# Altium PCB SiLPA_HE.PcbDoc (part 6 of 10)
Units mm, origin at the board's own origin, x right, y up, seen from the top; angles counter-clockwise.
Board outline 222.47 x 100.01 mm, 4 copper layers (Top Layer, Int1 (GND), Int2 (PWR), Bottom Layer), stack 1.508 mm thick; 661 components, 355 nets, 1925 pads, 1744 vias.
Unrouted connection lines stored in the file: 360.
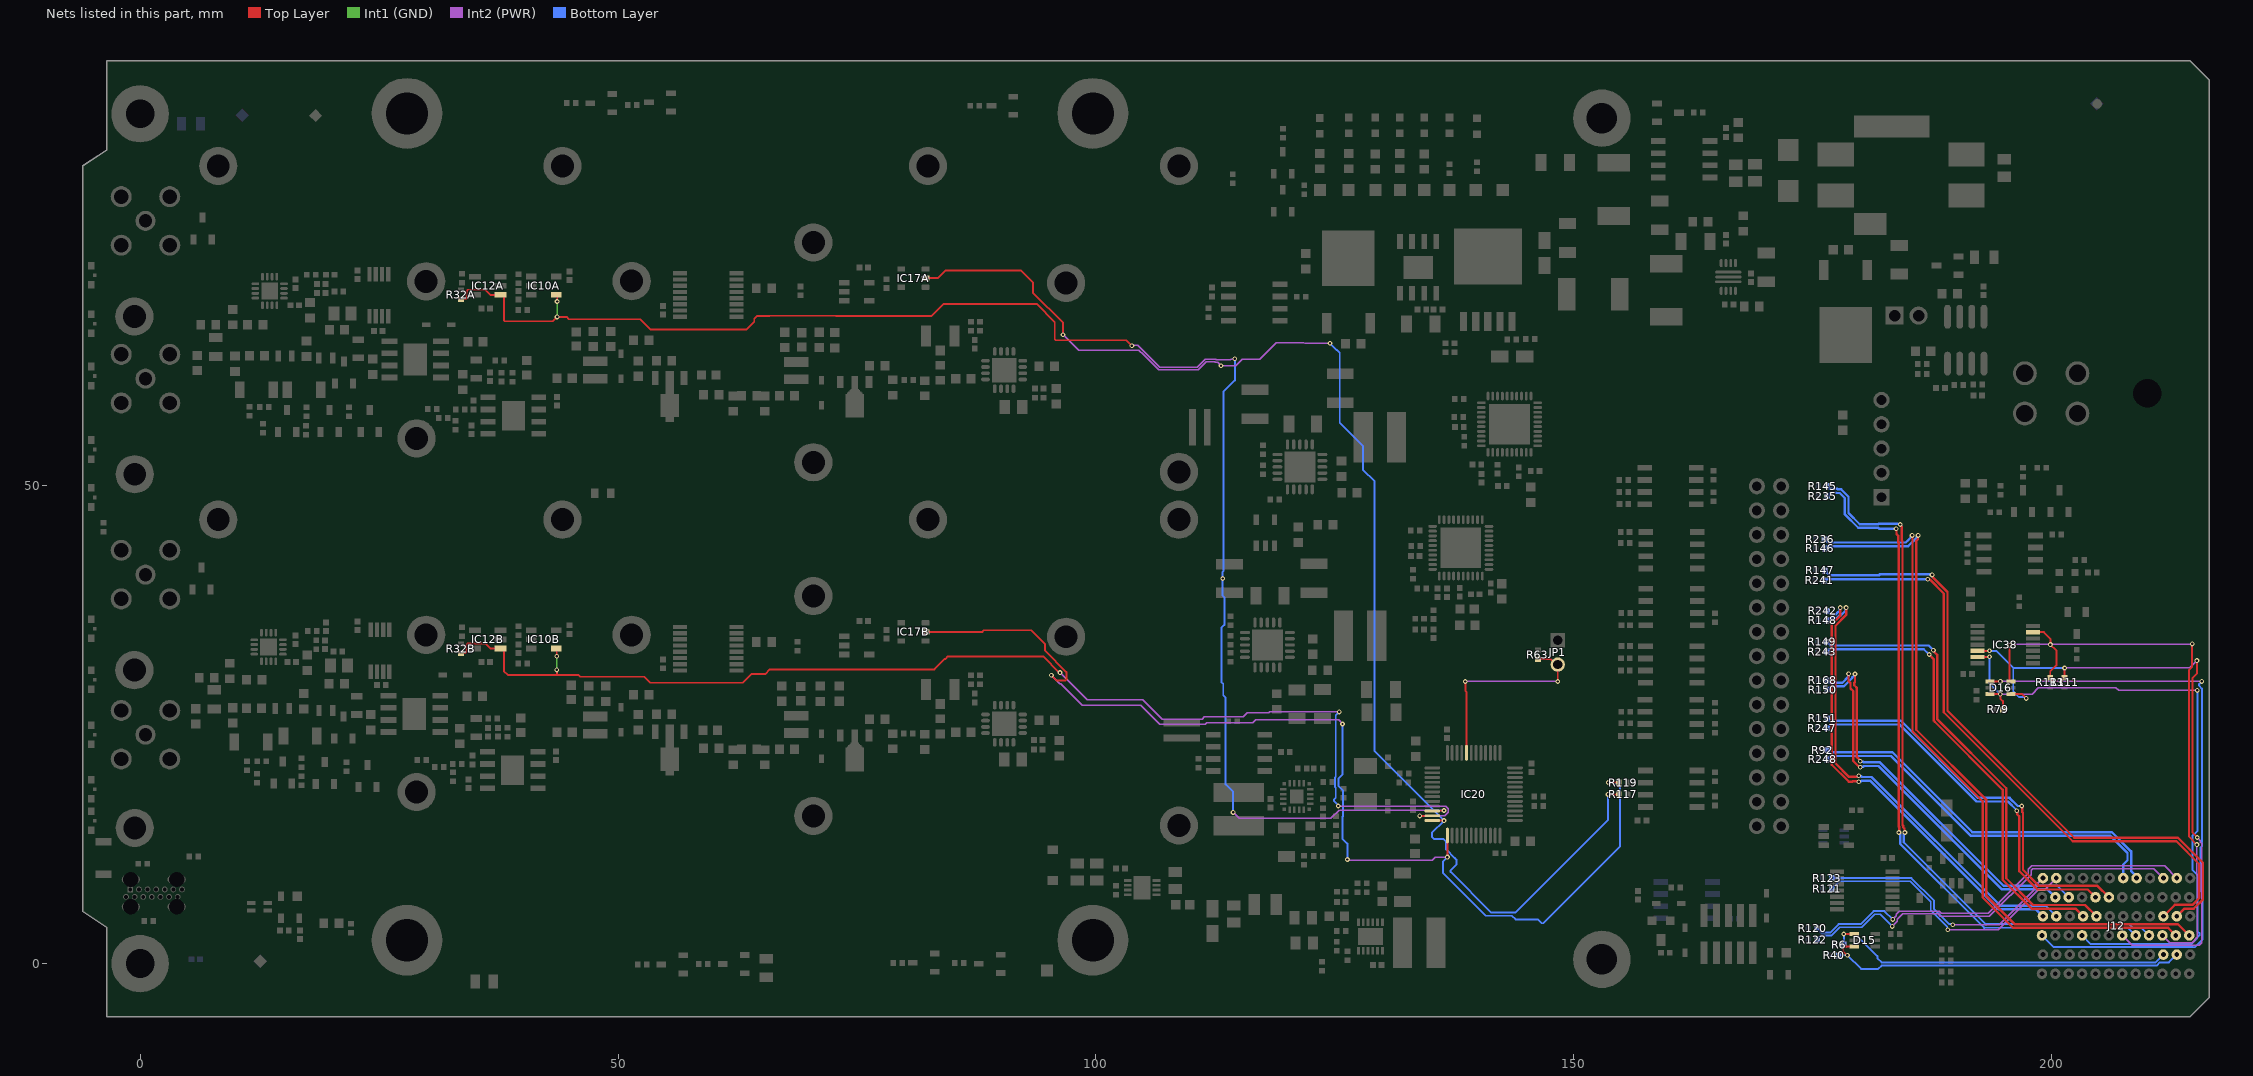
[diagram p5: the nets of this part, all layers, seen from the top]

## Part data (continued)
SCREW1A SCREW1B SCREW2A SCREW2B SCREW3A SCREW3B SCREW4A SCREW4B SCREW5A SCREW5B SCREW6A SCREW6B SCREW7A SCREW7B SCREW8A SCREW8B SCREW9A SCREW9B SCREW10A SCREW10B SCREW11A SCREW11B SCREW12A SCREW12B SCREW13A SCREW13B: library part BOSSARD_BN5687-3061579_v, "Screw", Manufacturer=BOSSARD, Manufacturer Part Number="BN5687 Art.3061579", Author="CERN DEM JLC", Component Type=Mechanical, ComponentHeight=5.6mm, CreateDate=01.11.2018, HelpURL=\\cern.ch\dfs\Applications\Altium\Datasheets\BOSSARD_BN5687-3061579.pdf, LatestRevisionDate=01.11.2018, Mounted=Yes, PackageDescription="M2 L=4mm Hexalobular Socket Pan Head Screw, Fully Threaded - Stainless Steel A2", Part Description="M2 L=4mm Hexalobular Socket Pan Head Screw, Fully Threaded, Stainless Steel A2", Part Number=BOSSARD_BN5687-3061579_v, Pin Count=0, PressFit=No, Sense=No, SMD=No, Socket=No, Status=None
SW1: library part CMP-08834-000057-1, "SWITCH TACTILE SPST-NO 0.05A 12V", Case/Package=SMD/SMT, Contact Resistance=100mR, Current Rating=50mA, Max Operating Temperature=70°C, Max Voltage Rating (DC)=12V, Min Operating Temperature=-25°C, Operating Force=1.59N, Package Quantity=1000, Ratings="Dust Proof", Actuator Length=0.7mm, Connector Type=SMD/SMT, Depth=3.2mm, Electrical Life=100000Cycles, Illumination Type=Non-Illuminated, Length=4mm, Max Current Rating=50mA, Mechanical Life=100000Cycles, Mount="Surface Mount", Orientation="Right Angle", Packaging="Tape and Reel", RoHS Compliant=Yes, Series=B3U, Switch Function=Off-Mom, Switch Travel=0.2mm, Termination="Gull Wing", Throw Configuration=SPST, Voltage Rating (DC)=12V, Weight=0.022g
T1 T2 T3 T4 T5 T9 T10 T11 T12: "N-CHANNEL MOSFET WITH DIODE", Case=SOT23-3, Manufacturer=NEXPERIA, Author="CERN DEM JLC", Bonding=No, Component Type=Standard, ComponentHeight=1.1mm, CreateDate=16.03.2010, Device=BSH103, HelpURL=\\cern.ch\dfs\Applications\Altium\Datasheets\BSH103.pdf, LatestRevisionDate=20.06.2017, Manufacturer Part Number=BSH103, Mounted=Yes, PackageDescription="SOT23, 0.95mm Pitch; 3 Pin, 1.30mm W X 2.90mm L X 1.10mm H body, IPC Medium Density", Part Description="30V, 850mA N-Channel Enhancement Mode Field-Effect Transistor", Part Number=BSH103, Pin Count=3, PressFit=No, Sense=No, SMD=Yes, Socket=No
T6A T6B T7A T7B T8A T8B T14 T15 T16 T17 T18 T19: "N-CHANNEL MOSFET WITH DIODE", Case=SOT23-3, Manufacturer="ON SEMICONDUCTOR", Author="CERN DEM JLC", Bonding=No, Component Type=Standard, ComponentHeight=1.11mm, CreateDate=23.03.2009, Device=BSS138LT1G, HelpURL=\\cern.ch\dfs\Applications\Altium\Datasheets\BSS138LT1G.pdf, LatestRevisionDate=23.03.2009, Manufacturer Part Number=BSS138LT1G, Mounted=Yes, Part Description="50V 200mA N-Channel Enhancement Mode Field-Effect Transistor", Part Number=BSS138LT1G, Pin Count=3, PressFit=No, Sense=No, SMD=Yes, Socket=No
  T6A T6B T7A T7B T8A T8B T14 T15 T16 T18 T19: PackageDescription="SOT23, 0.95mm Pitch; 3 Pin, 1.40mm W X 3.00mm L X 1.10mm H body, IPC Medium Density"
  T17: PackageDescription="SOT23 3-Leads, Pitch 0.95mm - Body 1.4x3mm, IPC Medium Density"
T13: "-30V -19.7A P-Channel MOSFET", Case=SOIC8, Manufacturer="VISHAY SILICONIX", Author="CERN DEM MR", Bonding=No, Component Type=Standard, ComponentHeight=1.75mm, CreateDate=05/10/2016, Device=SI4425DDY-T1-GE3, HelpURL=\\cern.ch\dfs\Applications\Altium\Datasheets\SI4425DDY-T1-GE3.pdf, LatestRevisionDate=05/10/2016, Manufacturer Part Number=SI4425DDY-T1-GE3, Mounted=Yes, PackageDescription="SOIC 8, Pitch 1.27mm - Body 4x5mm, IPC Medium Density", Part Description="-30V -19.7A P-Channel MOSFET", Part Number=SI4425DDY-T1-GE3, Pin Count=8, PressFit=No, Sense=No, SMD=Yes, Socket=No
TP1 TP2 TP3 TP4 TP5 TP16 TP18 TP22 TP23: library part SMD_PAD_1.27X1.27MM, Author="CERN DEM JLC", Component Type="Standard (No BOM)", ComponentHeight=0mm, CreateDate=12.01.2008, Family="Test Point", HelpURL=Undefined, LatestRevisionDate=12.01.2008, Mounted=No, PackageDescription="1.27mm x 1.27mm PCB Copper Area (SMD Test Point)", Part Description="1.27mm x 1.27mm PCB Copper Area (SMD Test Point)", Part Number=SMD_PAD_1.27X1.27MM, Pin Count=1, Sense=No, SMD=Yes, Socket=No, Status=None
U1: library part CMP-0192-00056-1, "PWM Fan Speed Controller with Auto-Shutdown and FanSense Technology, 8-Pin SOIC, Industrial Temperature", Code_IPC=SOIC127P600-8, DatasheetVersion="revC, Oct-2002", PackageDescription="8-Lead Plastic Small Outline (OA) - Narrow, 3.90mm Body [SOIC]", PackageReference=SOIC-OA8, PackageVersion="revBB, Aug-2009"
W1: library part SAMTEC_HTSW-105-23-L-S, "5 Mini Wire-Wrap Contact Strip Header", Manufacturer=SAMTEC, Manufacturer Part Number=HTSW-105-23-L-S, Author="CERN DEM JLC", Component Type=Standard, ComponentHeight=8.38mm, CreateDate=22.02.2018, Family="Header 5", HelpURL=\\cern.ch\dfs\Applications\Altium\Datasheets\SAMTEC_HTSW-105-23-L-S.pdf, LatestRevisionDate=22.02.2018, Mounted=Yes, Part Description="5 Contacts, Pitch 2.54mm, Single Row  Through Mount Straight Header (Post Lead 5.84mm, Tail Lead 2.92mm, Insulator 2.54mm)", Part Number=SAMTEC_HTSW-105-23-L-S, Pin Count=5, PressFit=No, Sense=No, SMD=No, Socket=No, Status=Preferred, Status Comment="High Temperature"
WASHER2 WASHER4 WASHER6 WASHER8: library part Keystone_7687, "SMA_Shoulder Washer", Manufacturer="custom 3D", Author=GK, Component Type=Mechanical, ComponentHeight=1.91mm, CreateDate=28.01.2016, HelpURL=\\cern.ch\dfs\Applications\Altium\Datasheets\AAVID-THERMALLOY_7721-7PPSG.pdf, LatestRevisionDate=28.01.2016, Manufacturer Part Number="custom 3D", Mounted=Yes, PackageDescription="Polyphenylene Sulfide PPS Shoulder Washer", Part Description="Polyphenylene Sulfide PPS Shoulder Washer", Part Number="custom 3D", Pin Count=0, PressFit=No, Sense=No, SMD=No, Socket=No, Status=None

## Free pads (board coordinates)
  round 6 hole 3.2: 0(152.927,0.443) 0(152.927,88.443)

## Via types
v1: diameter 0.5, hole 0.25, Top Layer to Bottom Layer, tented both sides, 1439 vias
v2: diameter 0.5, hole 0.25, Top Layer to Bottom Layer, tented bottom, 291 vias
v3: diameter 0.5, hole 0.25, Top Layer to Bottom Layer, 12 vias
v4: diameter 0.5, hole 0.25, Top Layer to Bottom Layer, tented top, 2 vias

## Nets (pads, with @x,y where several pads share a name; then routed paths per layer and width w, separated by ;. In a path a pad name is that pad's centre, name@x,y a point inside that pad or via, vN(x,y) a via of type N, cw(c..) or ccw(c..) an arc to the next point about the centre after c; other vN are vias at no path point)
ADC_IN0: IC10A.4 IC12A.1 IC20.10 R32A.1 | length 166
  Top Layer w0.152: IC10A.4@43.517,69.973 43.624,69.866 v1(43.624,69.26)
  Top Layer w0.2: R32A.1@33.427,69.503 34.044,69.503 34.161,69.62 34.161,70.356 34.294,70.489 36.131,70.489 36.677,69.943 37.851,69.943 38.057,69.737 38.057,68.753 38.059,68.751 38.059,67.29 38.147,67.202 43.172,67.202 v1(43.624,67.654) 44.623,67.654 44.869,67.408 52.341,67.408 53.429,66.319 63.428,66.319 64.252,67.143 64.252,67.467 64.551,67.766 65.856,67.766 65.86,67.771 72.789,67.771 72.793,67.766 82.811,67.766 84.066,69.021 93.779,69.021 95.685,67.116 95.685,65.3 95.772,65.212 103.186,65.212 v1(103.757,64.642) ; IC20.10@135.188,15.968 135.211,15.991 136.389,15.991 v1(136.413,16.015)
  Int2 (PWR) w0.15: v1(103.757,64.642) 103.824,64.708 104.199,64.708 ; 104.199,64.709 104.349,64.709 106.675,62.383 110.574,62.383 111.427,63.236 112.543,63.236 112.59,63.19 114.092,63.19 114.104,63.201 114.46,63.201 v1(114.527,63.268) ; v1(114.343,15.818) 114.98,15.181 124.566,15.181 125.424,16.04 ; 125.511,16.015 v1(136.413,16.015)
  Int1 (GND) w0.152: v1(43.624,67.654) v1(43.624,69.26)
  Bottom Layer w0.2: v1@113.31,40.348 v1(113.253,40.291) ; v1(114.343,15.818) 114.343,17.976 113.57,18.749 113.57,27.795 113.317,28.048 113.317,29.252 113.116,29.453 113.116,35.111 113.429,35.424 113.429,38.32 113.253,38.496 v1(113.253,40.291) ; v1@114.525,63.266 v1(114.527,63.268) 114.527,61.011 113.34,59.824 113.34,41.046 113.253,40.959 v1(113.253,40.291)
ADC_IN1: IC10B.4 IC12B.1 IC20.11 R32B.1 | length 129.4
  Top Layer w0.2: R32B.1@33.427,32.503 34.044,32.503 34.161,32.62 34.161,33.356 34.294,33.489 35.732,33.489 35.756,33.465 36.155,33.465 36.677,32.943 37.853,32.943 38.054,32.741 38.054,30.606 38.459,30.202 43.607,30.202 ; IC10B.4@43.517,32.973 43.591,32.899 v1(43.591,32.157) ; v1(43.591,30.726) 43.607,30.71 43.607,30.202 ; v1(96.241,30.445) 96.176,30.445 94.49,32.132 84.513,32.132 84.258,31.876 84.204,31.876 83.098,30.771 65.86,30.771 65.379,30.29 63.946,30.29 63.034,29.378 53.371,29.378 52.739,30.009 46.023,30.009 45.83,30.202 43.607,30.202 ; v1(133.868,15.451) 133.876,15.46 135.179,15.46 IC20.11@135.188,15.468
  Int2 (PWR) w0.15: v1(96.241,30.445) 99.086,27.6 104.897,27.6 106.912,25.585 111.098,25.585 111.313,25.8 115.387,25.8 115.564,25.977 ; 115.565,25.977 115.842,26.253 118.087,26.253 118.165,26.332 v1(125.44,26.332) ; v1(125.356,16.488) v1@125.36,16.492 ; v1@125.447,16.467 136.6,16.467 136.865,16.202 136.865,15.828 136.488,15.451 v1(133.868,15.451)
  Int1 (GND) w0.15: v1(43.591,30.726) v1(43.591,32.157)
  Bottom Layer w0.2: v1(125.356,16.488) 125.356,16.569 124.922,17.003 124.922,17.169 125.087,17.334 125.087,18.411 125.023,18.475 125.023,19.468 125.08,19.525 125.08,25.963 v1@125.44,26.323
ADC_IN2: IC17A.2 IC20.12 R117.1 | length 139.9
  Top Layer w0.2: IC17A.2@82.167,71.702 83.466,71.702 84.279,72.515 92.154,72.515 93.427,71.241 93.427,70.149 96.555,67.021 v1(96.555,65.795) ; IC20.12@135.188,14.968 135.193,14.963 136.407,14.963 v1(136.413,14.957) ; v1(153.572,17.696) 154.704,17.696 R117.1@154.707,17.693
  Int2 (PWR) w0.15: v1(96.555,65.795) 97.94,64.409 97.947,64.403 98.211,64.169 104.49,64.169 104.972,63.687 104.975,63.687 106.559,62.104 110.69,62.104 111.542,62.956 112.428,62.956 112.474,62.91 112.718,62.91 v1(113.076,62.552) 114.619,62.552 115.311,63.244 117.117,63.244 118.843,64.969 121.756,64.969 121.832,64.893 v1(124.479,64.893)
  Bottom Layer w0.2: v1@113.032,62.507 v1(113.076,62.552) ; v1(124.479,64.893) 125.189,64.183 125.225,64.183 125.504,63.903 125.504,56.6 127.933,54.171 127.933,51.687 129.158,50.462 129.158,22.213 v1(136.413,14.957) 135.137,13.682 135.137,13.272 135.383,13.026 136.358,13.026 136.638,12.747 136.638,11.942 137.546,11.035 137.705,10.876 137.705,10.35 137.425,10.07 137.104,9.749 137.104,9.583 141.358,5.329 143.838,5.329 153.572,15.064 v1(153.572,17.696)
ADC_IN3: IC17B.2 IC20.13 R119.1 | length 114.8
  Top Layer w0.2: IC17B.2@82.242,34.702 88.114,34.702 88.281,34.869 93.216,34.869 94.675,33.41 94.675,32.727 96.907,30.495 96.907,29.713 96.79,29.596 95.905,29.596 v1(95.336,30.164) ; v1(136.763,11.143) IC20.13@136.763,13.393 ; v1(153.586,18.943) R119.1@154.707,18.943
  Int2 (PWR) w0.15: v1(95.336,30.164) 95.336,30.147 96.184,29.299 96.294,29.299 98.543,27.05 104.664,27.05 106.679,25.035 111.416,25.035 111.587,25.205 116.396,25.205 116.708,25.518 125.383,25.518 125.787,25.114 v1(125.787,25.06) ; v1(126.304,10.888) v1@126.339,10.852 ; v1@126.426,10.827 135.166,10.827 135.482,11.143 v1(136.763,11.143)
  Bottom Layer w0.2: v1(125.787,25.06) 125.787,19.77 125.353,19.336 125.353,18.607 125.833,18.127 125.833,15.386 125.787,15.339 125.787,13.077 126.304,12.56 v1(126.304,10.888) ; v1(136.763,11.143) 136.308,10.688 136.308,9.466 140.772,5.002 143.516,5.002 143.9,4.618 146.227,4.618 146.63,4.215 146.796,4.215 154.841,12.26 154.841,18.387 154.285,18.943 v1(153.586,18.943)
BGA0: D16.3 IC38.6 J12.C3 R113.2 | length 65.2
  Top Layer w0.2: v1(195.579,33.286) 195.579,29.636 195.703,29.512 D16.3@195.736,29.512 ; IC38.6@198.036,34.668 199.163,34.668 199.852,33.979 v1(199.852,33.368) 200.466,32.754 200.466,31.203 199.832,30.569 R113.2@199.832,29.92 ; v1@214.765,33.443 214.677,33.355 214.677,31.05 214.352,30.725 214.352,13.268 v1(215.177,12.443)
  Int2 (PWR) w0.15: v1(195.579,33.286) 195.622,33.329 196.058,33.329 196.134,33.406 199.815,33.406 v1(199.852,33.368) 199.89,33.406 214.639,33.406 v1(214.677,33.443) ; J12.C3@211.566,2.943 212.319,2.19 214.678,2.19 215.219,2.731 215.219,9.255 215.177,9.297 v1(215.177,12.443)
BGA1: D16.1 IC38.12 J12.F3 R111.2 | length 69.8
  Top Layer w0.2: IC38.12@192.236,32.718 v1(193.481,32.718) ; D16.1@195.736,28.212 196.841,28.212 v1(197.313,27.741) ; v1(201.33,30.927) 201.33,29.923 R111.2@201.332,29.92 ; v1(215.177,31.693) 215.177,30.343 214.715,29.881 214.715,13.696 v1(215.218,13.193)
  Int2 (PWR) w0.15: v1(201.33,30.927) 214.411,30.927 v1(215.177,31.693) ; J12.F3@207.366,2.943 208.399,1.91 215.394,1.91 215.677,2.193 215.677,12.584 215.547,12.714 215.547,12.844 215.218,13.173 v1(215.218,13.193)
  Bottom Layer w0.2: v1(193.481,32.718) 194.174,32.718 195.965,30.927 ; v1(197.313,27.741) 197.218,27.741 197.071,27.888 196.561,27.888 195.965,28.485 195.965,30.927 ; v1(201.33,30.927) 195.965,30.927
BGA2: D16.6 IC38.13 J12.I3 R79.2 | length 68.6
  Top Layer w0.2: IC38.13@192.236,32.068 192.259,32.091 v1(193.481,32.091) ; D16.6@193.536,28.212 193.546,28.203 194.592,28.203 v1(194.602,28.193) 194.608,28.187 194.608,27.718 194.872,27.453 R79.2@194.872,26.589
  Int2 (PWR) w0.15: v1(194.602,28.193) 197.927,28.193 198.596,28.862 206.705,28.862 206.989,28.578 v1(215.218,28.578)
  Bottom Layer w0.2: v1(193.481,32.091) 193.481,29.314 v1(194.602,28.193) ; J12.I3@203.166,2.943 204.062,2.047 214.569,2.047 215.143,2.621 215.143,2.655 215.427,2.939 215.427,3.193 215.218,3.402 215.218,4.596 215.243,4.621 215.243,9.265 214.7,9.808 214.7,13.349 215.218,13.868 v1(215.218,28.578)
BGA3: D16.4 J12.L3 | length 67.2
  Top Layer w0.2: D16.4@193.536,29.512 193.541,29.517 194.611,29.517 v1(194.616,29.522)
  Int2 (PWR) w0.15: v1(194.616,29.522) v1(215.677,29.522)
  Bottom Layer w0.2: J12.L3@198.966,2.943 200.189,1.72 214.788,1.72 214.796,1.712 214.962,1.712 215.754,2.504 215.754,7.39 215.57,7.574 215.57,12.161 215.695,12.287 215.695,28.776 215.396,29.075 215.396,29.241 v1(215.677,29.522)
BOOT0: IC20.44 JP1.2 R63.1 | length 21.6
  Top Layer w0.2: v1(138.642,29.514) 138.642,28.531 138.763,28.41 IC20.44@138.763,22.043 ; R63.1@146.227,31.84 146.244,31.857 147.567,31.857 148.143,31.281 JP1.2@148.31,31.281 v1(148.31,29.514)
  Int2 (PWR) w0.15: v1(138.642,29.514) v1(148.31,29.514)
  Bottom Layer w0.2: JP1.2@148.039,31.281 JP1.2@148.31,31.281
BP_I2C.SCL: D15.3 J12.B2 R40.1 | length 38.7
  Top Layer w0.2: v1(178.615,0.869) 178.548,0.869 178.178,1.239 178.178,1.584 178.387,1.793 D15.3@179.327,1.793
  Bottom Layer w0.2: R40.1@177.724,0.857 177.736,0.869 v1(178.615,0.869) 180.047,-0.563 181.123,-0.563 181.128,-0.557 181.834,-0.557 182.187,-0.204 210.981,-0.204 211.308,0.123 212.246,0.123 J12.B2@213.066,0.943
BP_I2C.SDA: D15.1 J12.C2 R6.1 | length 37.2
  Top Layer w0.2: v1(178.23,3.089) 178.233,3.091 179.325,3.091 D15.1@179.327,3.093
  Bottom Layer w0.2: R6.1@178.206,1.993 178.237,2.024 v1@178.237,2.879 ; v1@178.288,3.032 178.237,3.082 v1(178.23,3.089) 179.436,3.089 181.741,0.784 181.741,0.568 182.187,0.123 210.846,0.123 J12.C2@211.666,0.943
BP_IO.LVDS_N0: J12.E3 R235.1 | length 71.7
  Top Layer w0.245: v1(183.702,45.493) 183.749,45.446 183.749,44.926 183.932,44.743 183.932,44.082 183.996,44.018 183.996,14.332 184.047,14.28 184.047,13.765 v1(184,13.718)
  Bottom Layer w0.2: 192.918,3.747 207.962,3.747 J12.E3@208.766,2.943
  Bottom Layer w0.245: R235.1@176.497,48.893 176.497,48.913 176.66,49.076 176.68,49.076 176.894,49.29 177.377,49.29 177.441,49.227 177.803,49.227 178.35,48.68 178.35,46.986 179.747,45.589 181.852,45.589 181.948,45.493 v1(183.702,45.493) ; v1(184,13.718) 184,13.651 184.123,13.528 184.123,12.542 192.918,3.747
BP_IO.LVDS_N1: J12.B3 R236.1 | length 72.5
  Top Layer w0.245: v1(185.377,44.793) 185.377,44.576 185.427,44.526 185.427,24.313 192.773,16.967 192.773,6.917 195.943,3.747 212.162,3.747 J12.B3@212.966,2.943
  Bottom Layer w0.245: R236.1@176.217,44.393 176.217,44.373 176.38,44.21 176.4,44.21 176.565,44.045 184.717,44.045 184.971,44.299 184.971,44.32 185.377,44.726 v1(185.377,44.793)
BP_IO.LVDS_N2: J12.C4 R241.1 | length 67
  Top Layer w0.245: v1(187.025,40.216) 187.063,40.178 187.237,40.178 188.698,38.717 188.698,26.288 202.195,12.791 213.024,12.791 215.425,10.39 215.425,6.865 214.699,6.139 212.862,6.139 J12.C4@211.666,4.943
  Bottom Layer w0.245: R241.1@176.197,40.093 176.32,40.216 v1(187.025,40.216)
BP_IO.LVDS_N3: J12.L4 R242.1 | length 47.6
  Top Layer w0.245: v1(177.852,37.243) 177.852,36.374 176.979,35.501 176.979,20.808 178.749,19.038 179.144,19.038 179.171,19.065 179.755,19.065 v1(179.802,19.018)
  Bottom Layer w0.245: R242.1@176.497,36.893 176.497,36.873 176.66,36.71 176.68,36.71 176.87,36.52 177.378,36.52 177.639,36.78 177.728,36.78 177.805,36.857 177.805,37.196 v1(177.852,37.243) ; v1(179.802,19.018) 179.849,19.065 180.051,19.065 180.127,19.141 180.98,19.141 194.455,5.666 198.343,5.666 J12.L4@199.066,4.943
BP_IO.LVDS_N4: J12.I4 R243.1 | length 47.8
  Top Layer w0.245: v1(187.168,32.329) 187.627,31.87 187.627,25.426 187.74,25.313 187.74,25.3 194.848,18.192 194.848,8.763 197.864,5.747 202.462,5.747 J12.I4@203.266,4.943
  Bottom Layer w0.245: R243.1@176.467,32.643 176.467,32.663 176.63,32.826 176.65,32.826 176.713,32.889 186.608,32.889 v1(187.168,32.329)
BP_IO.LVDS_N5: J12.K5 R168.1 | length 39.4
  Top Layer w0.245: v1(178.732,30.331) 178.732,29.577 178.941,29.368 178.941,28.792 179.223,28.51 179.223,21.199 179.756,20.666 179.775,20.666 179.898,20.543 v1(179.965,20.543)
  Bottom Layer w0.245: R168.1@176.497,29.621 176.497,29.601 176.66,29.438 176.68,29.438 176.732,29.386 178.091,29.386 178.737,30.033 178.737,30.325 v1(178.732,30.331) ; v1(179.965,20.543) 180.012,20.59 180.276,20.59 180.352,20.666 181.87,20.666 194.778,7.758 199.551,7.758 J12.K5@200.366,6.943
BP_IO.LVDS_N6: J12.H5 R247.1 | length 39.4
  Top Layer w0.245: v1(196.331,15.993) 196.378,15.946 196.378,15.772 196.388,15.761 196.388,15.606 196.601,15.393 196.601,9.655 198.509,7.747 203.762,7.747 204.396,7.113 204.566,7.113 J12.H5@204.566,6.943
  Bottom Layer w0.245: R247.1@176.467,24.643 176.467,24.663 176.63,24.826 176.65,24.826 176.84,25.016 184.049,25.016 192.111,16.954 195.427,16.954 196.331,16.05 v1(196.331,15.993)
BP_IO.LVDS_N7: J12.F6 R248.1 | length 38.6
  Bottom Layer w0.245: R248.1@176.497,21.365 176.497,21.385 176.66,21.548 176.68,21.548 176.856,21.724 183.166,21.724 191.528,13.362 206.127,13.362 207.912,11.577 207.912,10.818 207.466,10.372 J12.F6@207.466,8.943
BP_IO.LVDS_N8: J12.C6 R122.1 | length 41.4
  Int2 (PWR) w0.15: v1(183.297,3.891) 183.83,4.424 183.83,4.615 184.41,5.195 188.101,5.195 188.335,4.96 193.476,4.96 197.829,9.313 197.829,9.752 198.021,9.943 210.666,9.943 J12.C6@211.666,8.943
  Bottom Layer w0.2: R122.1@175.438,2.503 175.438,2.523 175.84,2.924 176.941,2.924 177.818,3.801 180.121,3.801 181.483,5.163 182.025,5.163 v1(183.297,3.891)
BP_IO.LVDS_N9: J12.L6 R123.1 | length 26.8
  Int2 (PWR) w0.15: v1(189.627,4.06) 194.49,4.06 198.109,7.679 198.109,7.986 J12.L6@199.066,8.943
  Bottom Layer w0.2: R123.1@176.967,8.943 185.314,8.943 187.655,6.602 187.655,5.727 189.253,4.129 189.558,4.129 v1(189.627,4.06)
BP_IO.LVDS_P0: J12.D3 R145.1 | length 73.5
  Top Layer w0.245: v1(184.145,45.936) 184.145,45.87 184.313,45.702 184.313,44.239 184.377,44.176 184.377,14.489 184.44,14.426 184.44,14.268 184.58,14.129 184.58,13.765 v1(184.627,13.718)
  Bottom Layer w0.2: 193.085,4.119 208.116,4.119 208.488,3.747 209.362,3.747 J12.D3@210.166,2.943
  Bottom Layer w0.245: R145.1@176.497,49.941 176.497,49.921 176.66,49.758 176.68,49.758 176.767,49.671 177.535,49.671 177.598,49.608 177.961,49.608 178.731,48.838 178.731,47.144 179.905,45.97 181.852,45.97 181.879,45.997 183.911,45.997 183.924,45.983 184.098,45.983 v1(184.145,45.936) ; v1(184.627,13.718) 184.627,13.651 184.504,13.528 184.504,12.7 193.085,4.119
BP_IO.LVDS_P1: J12.A3 R146.1 | length 74.1
  Top Layer w0.245: v1(186.004,44.793) 186.004,44.418 185.808,44.222 185.808,24.471 193.154,17.125 193.154,7.075 196.101,4.128 213.181,4.128 J12.A3@214.366,2.943
  Bottom Layer w0.245: R146.1@176.247,43.443 176.247,43.463 176.41,43.626 176.43,43.626 176.468,43.664 184.961,43.664 185.881,44.584 185.881,44.603 186.004,44.726 v1(186.004,44.793)
BP_IO.LVDS_P2: J12.B4 R147.1 | length 67
  Top Layer w0.245: v1(187.469,40.66) 187.507,40.622 187.507,40.448 189.079,38.875 189.079,26.446 202.353,13.172 213.182,13.172 215.806,10.548 215.806,6.707 214.846,5.747 213.87,5.747 J12.B4@213.066,4.943
  Bottom Layer w0.245: R147.1@176.247,41.143 176.247,41.123 176.761,40.609 181.901,40.609 182.008,40.716 187.343,40.716 187.4,40.66 v1(187.469,40.66)
BP_IO.LVDS_P3: J12.K4 R148.1 | length 49.3
  Top Layer w0.245: v1(178.479,37.243) 178.479,36.462 177.36,35.343 177.36,20.965 178.792,19.533 179.624,19.533 179.735,19.645 v1(179.802,19.645)
  Bottom Layer w0.245: R148.1@176.497,35.893 176.497,35.913 176.66,36.076 176.68,36.076 176.743,36.139 177.536,36.139 177.796,36.399 177.886,36.399 178.432,36.945 178.432,37.196 v1(178.479,37.243) ; v1(179.802,19.645) 179.849,19.598 180.051,19.598 180.127,19.522 181.138,19.522 194.613,6.047 199.362,6.047 J12.K4@200.466,4.943
BP_IO.LVDS_P4: J12.H4 R149.1 | length 49.6
  Top Layer w0.245: v1(187.611,32.772) 187.611,32.703 187.999,32.316 187.999,25.58 195.229,18.35 195.229,8.921 198.022,6.128 203.481,6.128 J12.H4@204.666,4.943
  Bottom Layer w0.245: R149.1@176.467,33.643 176.467,33.623 176.63,33.46 176.65,33.46 176.84,33.27 187.114,33.27 v1(187.611,32.772)
BP_IO.LVDS_P5: J12.J5 R150.1 | length 40.8
  Top Layer w0.245: v1(179.404,30.293) 179.404,29.45 179.322,29.368 179.322,29.125 179.604,28.843 179.604,21.598 179.965,21.237 v1(179.965,21.17)
  Bottom Layer w0.245: R150.1@176.497,28.643 176.497,28.663 176.66,28.826 176.68,28.826 176.859,29.005 178.248,29.005 179.118,29.875 179.118,29.941 179.404,30.226 v1(179.404,30.293) ; v1(179.965,21.17) 180.012,21.123 180.276,21.123 180.352,21.047 182.028,21.047 194.936,8.139 200.57,8.139 J12.J5@201.766,6.943
BP_IO.LVDS_P6: J12.G5 R151.1 | length 41.1
  Top Layer w0.245: v1(196.845,16.486) 196.892,16.439 196.892,15.865 196.982,15.775 196.982,9.813 198.667,8.128 204.781,8.128 J12.G5@205.966,6.943
  Bottom Layer w0.245: R151.1@176.497,25.643 176.497,25.623 176.66,25.46 176.68,25.46 176.743,25.397 184.207,25.397 192.269,17.335 195.585,17.335 196.434,16.486 v1(196.845,16.486)
BP_IO.LVDS_P7: J12.E6 R92.1 | length 39.2
  Bottom Layer w0.245: R92.1@176.497,22.337 176.497,22.317 176.66,22.154 176.68,22.154 176.729,22.105 183.324,22.105 191.686,13.743 206.285,13.743 208.293,11.735 208.293,9.687 208.866,9.114 J12.E6@208.866,8.943
BP_IO.LVDS_P8: J12.B6 R120.1 | length 42.5
  Int2 (PWR) w0.15: v1(183.353,4.622) 183.717,4.986 183.717,5.177 184.014,5.474 188.217,5.474 188.451,5.24 193.361,5.24 197.55,9.429 197.55,9.867 197.905,10.222 211.787,10.222 J12.B6@213.066,8.943
  Bottom Layer w0.2: R120.1@175.438,3.694 175.438,3.674 175.862,3.251 176.806,3.251 177.683,4.128 179.986,4.128 181.348,5.49 182.484,5.49 v1(183.353,4.622)
BP_IO.LVDS_P9: J12.K6 R121.1 | length 28.8
  Int2 (PWR) w0.15: v1(189.113,3.546) 194.371,3.546 198.521,7.696 199.219,7.696 J12.K6@200.466,8.943
  Bottom Layer w0.2: R121.1@176.967,7.813 176.967,7.833 177.157,8.023 177.177,8.023 177.77,8.616 185.178,8.616 187.328,6.466 187.328,5.592 189.056,3.864 189.056,3.603 v1(189.113,3.546)